# EAGLE board combined (EAGLE 5.11)
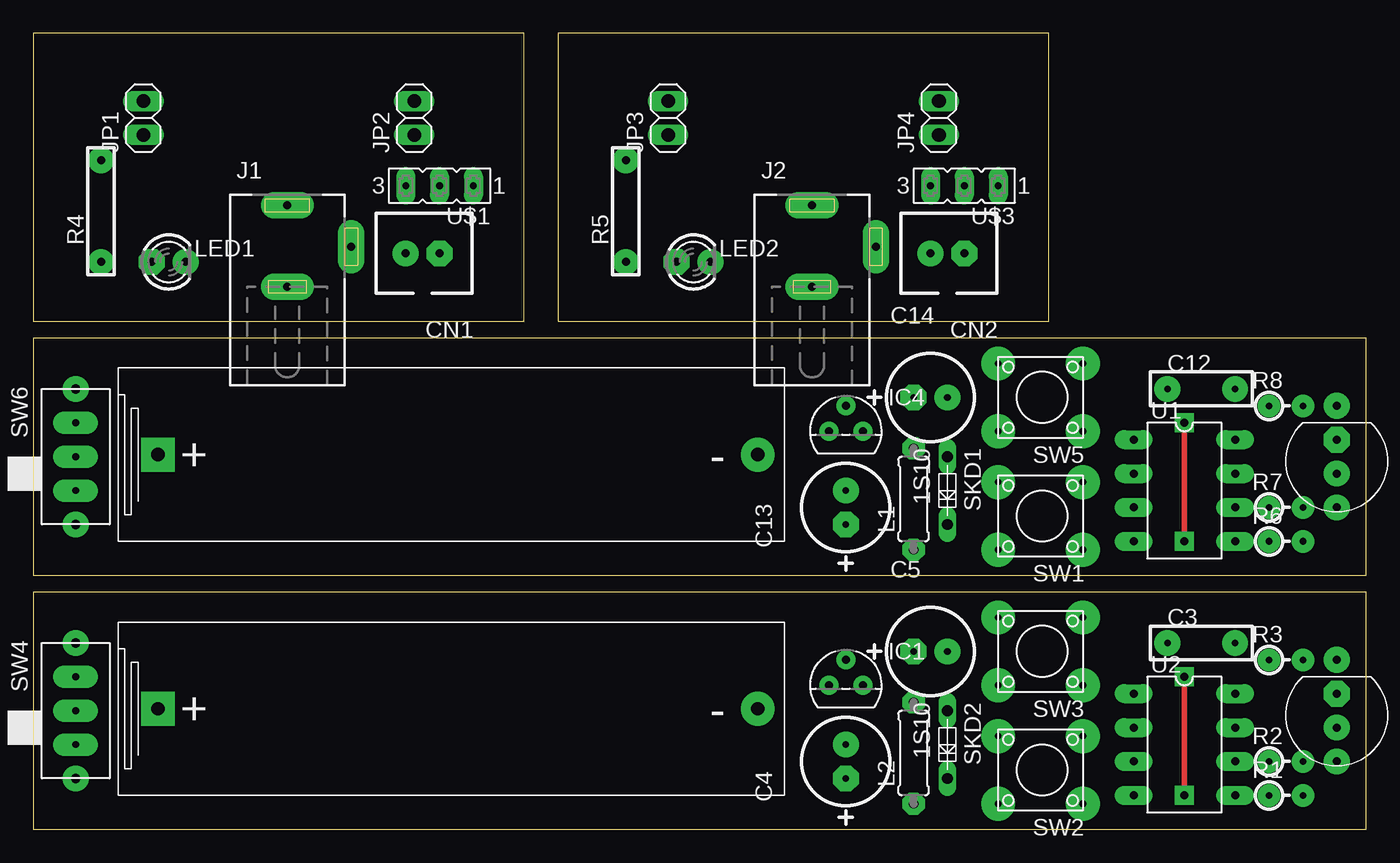
[diagram p0: board, top side]
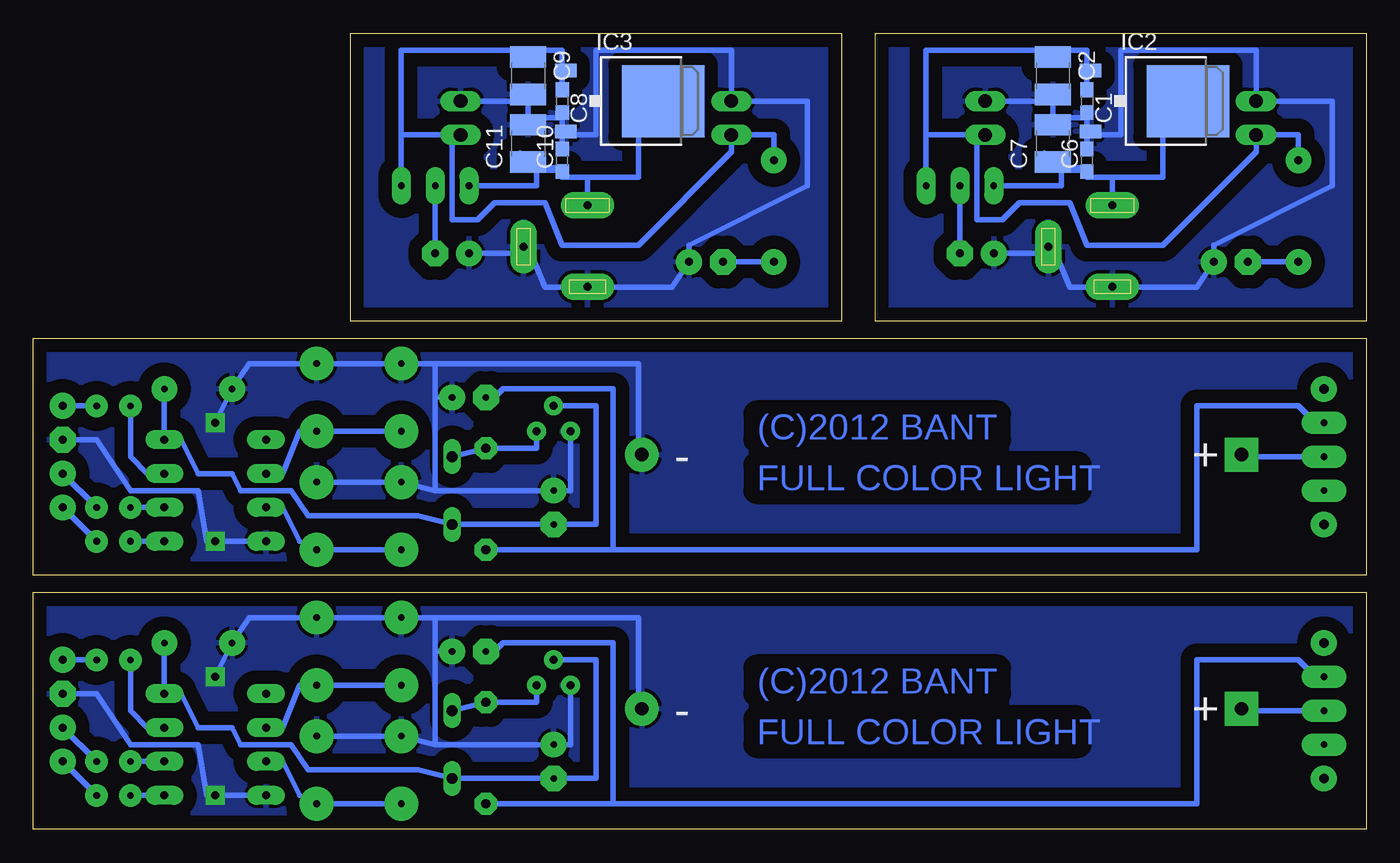
[diagram p1: board, bottom side, seen from below]

Size 100 x 59.69 mm. Coordinates in mm from the lower left corner, seen from the top.
Outline: 0,0 100,0 100,17.78 0,17.78 0,0
Outline: 36.83,38.1 36.83,59.69 0,59.69 0,38.1 36.83,38.1
Outline: 76.2,38.1 76.2,59.69 39.37,59.69 39.37,38.1 76.2,38.1
Outline: 0,19.05 100,19.05 100,36.83 0,36.83 0,19.05
Copper layers (1*16): Top 0.035mm / dielectric 1.5mm / Bottom 0.035mm
Design rules "default": minimum track width 10mil, minimum drill 24mil, track to track 8mil, track to pad 8mil, pad to pad 8mil, via to via 8mil, smd to smd 8mil, copper to edge 40mil, drill to drill 8mil, minimum pad ring 10mil, minimum via ring 8mil, stop-mask expansion 4mil, vias tented up to drill 0mil, thermal gap 10mil

## Footprints (pad centres in the part's own frame; a part is rotated, then mirrored left to right if it is on the bottom)
BH411-1P = drill 1 pad 2.54 round: BATT-MINUS 48,6.5 | drill 1 pad 2.54 square: BATT-PLUS 3,6.5
C1608 = smd 1.1 x 1: 1 -0.85,0; 2 0.85,0
C3225 = smd 1.6 x 2.7: 1 -1.4,0; 2 1.4,0
CAP_DIP_2 = drill 0.5 pad 1.93 round: 1 -2.54,0; 2 2.54,0
CCAP_6.5 = drill 0.5 pad 1.93 octagon: + -1.27,0 | drill 0.5 pad 1.93 round: - 1.27,0
CON_HRS_DIP_2 = drill 0.6 pad 1.93 octagon: 1 -1.27,0 | drill 0.6 pad 1.93 round: 2 1.27,0
TO92_TRI = drill 0.6 pad 1.422 round: 1 -1.27,0; 2 0,1.905; 3 1.27,0
TO252 = smd 1 x 1.6: 1 -2.28,-4.8; 2 2.28,-4.8 | smd 5.4 x 6.2: 3 0,2.5
DCJ0202 = drill 0.6 pad 2 long: 1 0,6.148; 2 4.8,3.048; 3 0,0.048
1X02 = drill 1.016 long: 1 -1.27,0; 2 1.27,0
0207/7 = drill 0.7 pad 1.676 octagon: 1 -3.81,0; 2 3.81,0
LED3MM = drill 0.6 pad 1.93 octagon: A -1.27,0 | drill 0.6 pad 1.93 round: K 1.27,0
R_0.125W_1 = drill 0.5 pad 1.676 round: 1 -1.27,0; 2 1.27,0
R_0.125W_3 = drill 0.6 pad 1.93 round: 1 -3.81,0; 2 3.81,0
R-1 = drill 0.8 long: 1-A -2.54,0; 2-K 2.54,0
B3F-10X = drill 0.5 pad 2.54 round: 1 -1.27,2.54; 2 5.08,2.54; 3 -1.27,-2.54; 4 5.08,-2.54
DS-3-SIDE = drill 0.5 pad 1.676 long: 1 0,-2.54; 2 0,0; 3 0,2.54 | drill 0.7 pad 1.93 round: P$1 0,5.08; P$2 0,-5.08
DIL08 = drill 0.6 pad 1.422 long: 1 -3.81,-3.81; 2 -1.27,-3.81; 3 1.27,-3.81; 4 3.81,-3.81; 5 3.81,3.81; 6 1.27,3.81; 7 -1.27,3.81; 8 -3.81,3.81
CON-S3-1 = drill 0.5 pad 1.422 long: 1 -2.54,0; 2 0,0; 3 2.54,0
OSTA-LED = drill 0.6 pad 1.93 round: P$1 -3.81,0; P$2 -1.27,0; P$4 3.81,0 | drill 0.6 pad 1.93 octagon: P$3 1.27,0

## Placement (x,y rotation side)
BATT1  BH411-1P  [BH411-1P]  6.35,2.54 0 top
BATT2  BH411-1P  [BH411-1P]  6.35,21.59 0 top
C1  0.1uF  [C1608]  20.95,54.61 270 bottom
C2  4.7uF  [C3225]  23.5,56.52 270 bottom
C3  0.1u(104)  [CAP_DIP_2]  87.63,13.97 0 top
C4  22u  [CCAP_6.5]  60.96,5.08 90 top
C5  47u  [CCAP_6.5]  67.31,13.34 0 top
C6  0.1uF  [C1608]  20.95,50.16 90 bottom
C7  10uF  [C3225]  23.5,51.44 90 bottom
C8  0.1uF  [C1608]  60.33,54.61 270 bottom
C9  4.7uF  [C3225]  62.87,56.52 270 bottom
C10  0.1uF  [C1608]  60.33,50.16 90 bottom
C11  10uF  [C3225]  62.87,51.44 90 bottom
C12  0.1u(104)  [CAP_DIP_2]  87.63,33.02 0 top
C13  22u  [CCAP_6.5]  60.96,24.13 90 top
C14  47u  [CCAP_6.5]  67.31,32.38 0 top
CN1  [CON_HRS_DIP_2]  29.21,43.18 180 top
CN2  [CON_HRS_DIP_2]  68.58,43.18 180 top
IC1  HT7750A  [TO92_TRI]  60.96,10.79 0 top
IC2  NJU7223DL1-33  [TO252]  15.88,54.61 270 bottom
IC3  NJU7223DL1-33  [TO252]  55.24,54.61 270 bottom
IC4  HT7750A  [TO92_TRI]  60.96,29.84 0 top
J1  DC_JACK  [DCJ0202]  19.05,40.64 0 top
J2  DC_JACK  [DCJ0202]  58.42,40.64 0 top
JP1  [1X02]  8.26,53.34 90 top
JP2  [1X02]  28.57,53.34 90 top
JP3  [1X02]  47.62,53.34 90 top
JP4  [1X02]  67.94,53.34 90 top
L1  100u  [0207/7]  66.04,24.77 90 top
L2  100u  [0207/7]  66.04,5.71 90 top
LED1  GREEN  [LED3MM]  10.16,42.55 0 top
LED2  GREEN  [LED3MM]  49.53,42.55 0 top
R1  100  [R_0.125W_1]  93.98,2.54 0 top
R2  100  [R_0.125W_1]  93.98,5.08 0 top
R3  200  [R_0.125W_1]  93.98,12.7 0 top
R4  330  [R_0.125W_3]  5.08,46.35 90 top
R5  330  [R_0.125W_3]  44.45,46.35 90 top
R6  100  [R_0.125W_1]  93.98,21.59 0 top
R7  100  [R_0.125W_1]  93.98,24.13 0 top
R8  200  [R_0.125W_1]  93.98,31.75 0 top
SKD1  1S10  [R-1]  68.58,25.4 270 top
SKD2  1S10  [R-1]  68.58,6.35 270 top
SW1  TACT-SW  [B3F-10X]  77.47,23.5 180 top
SW2  TACT-SW  [B3F-10X]  77.47,4.45 180 top
SW3  TACT-SW  [B3F-10X]  77.47,13.34 180 top
SW4  POWER SW  [DS-3-SIDE]  3.17,8.89 0 top
SW5  TACT-SW  [B3F-10X]  77.47,32.38 180 top
SW6  POWER SW  [DS-3-SIDE]  3.17,27.94 0 top
U1  ATTINY13  [DIL08]  86.36,25.4 270 top
U2  ATTINY13  [DIL08]  86.36,6.35 270 top
U$1  CON-S3-1  [CON-S3-1]  30.48,48.26 180 top
U$2  FULL-COLOR-LED  [OSTA-LED]  97.79,8.89 90 top
U$3  CON-S3-1  [CON-S3-1]  69.85,48.26 180 top
U$4  FULL-COLOR-LED  [OSTA-LED]  97.79,27.94 90 top

## Library data of the parts
BATT1 BATT2 = densikit
C1-C14 CN1 CN2 J1 J2 R1-R8 SW1-SW6 = MyLib
IC1 IC4 SKD1 SKD2 = keinSoft-01
IC2 IC3 U$1 U$3 = bant
JP1-JP4 = pinheader
L1 L2 = rcl
LED1 LED2 U$2 U$4 = led
U1 U2 = atmel

## Nets
GND: BATT1.BATT-MINUS C3.1 C4.- C5.- IC1.1 SW2.3 SW2.4 SW3.3 SW3.4 U2.4 U$2.P$3
GND1: C1.2 C2.2 C6.2 C7.2 CN1.2 IC2.2 J1.2 J1.3 JP1.2 JP2.2 LED1.K
GND2: C8.2 C9.2 C10.2 C11.2 CN2.2 IC3.2 J2.2 J2.3 JP3.2 JP4.2 LED2.K
GND3: BATT2.BATT-MINUS C12.1 C13.- C14.- IC4.1 SW1.3 SW1.4 SW5.3 SW5.4 U1.4 U$4.P$3
N$1: BATT1.BATT-PLUS SW4.2
N$2: R1.2 U$2.P$1
N$3: R2.2 U$2.P$2
N$4: R3.2 U$2.P$4
N$5: SW3.1 SW3.2 U2.2
N$6: R2.1 U2.6
N$7: R3.1 U2.7
N$8: CN1.1 U$1.2
N$9: R1.1 U2.5
N$10: LED1.A R4.1
N$11: IC1.3 L2.2 SKD2.1-A
N$12: LED2.A R5.1
N$13: CN2.1 U$3.2
N$14: SW2.1 SW2.2 U2.3
N$15: R6.2 U$4.P$1
N$16: R7.2 U$4.P$2
N$17: R8.2 U$4.P$4
N$18: SW1.1 SW1.2 U1.3
N$19: SW5.1 SW5.2 U1.2
N$20: R8.1 U1.7
N$21: R6.1 U1.5
N$22: IC4.3 L1.2 SKD1.1-A
N$23: BATT2.BATT-PLUS SW6.2
N$24: R7.1 U1.6
VCC: C3.2 C4.+ IC1.2 SKD2.2-K U2.8
VCC1: C1.1 C2.1 IC2.1 JP1.1 JP2.1 R4.2 U$1.1
VCC2: C8.1 C9.1 IC3.1 JP3.1 JP4.1 R5.2 U$3.1
VCC3: C12.2 C13.+ IC4.2 SKD1.2-K U1.8
VDD: C6.1 C7.1 IC2.3 J1.1 U$1.3
VDD1: C10.1 C11.1 IC3.3 J2.1 U$3.3
VPP: C5.+ L2.1 SW4.3
VPP1: C14.+ L1.1 SW6.3

## Tracks (layer width: path | path; a pad name or v marks a point on that pad's centre or on a via)
GND  (via drill 0.6 pad 1.42)
  Top 0.406: v86.36,11.43 v86.36,2.54
  Bottom 0.406: IC1.1 59.69,6.35 C4.- 69.85,6.35 | SW2.3 SW2.4 69.85,6.35 | U2.4 v86.36,2.54 87,2.54 87.63,6.35 92.71,6.35 95.25,10.16 U$2.P$3 | BATT1.BATT-MINUS 54.61,9.53 54.61,15.88 69.85,15.88 | 69.85,15.88 SW3.4 SW3.3 83.82,15.88 C3.1 v86.36,11.43 | 69.85,15.88 69.85,13.34 | 69.85,13.34 C5.- | 69.85,13.34 69.85,6.35
  pour Bottom (isolate 1.016): 0,17.78 0,0 100.33,0 100.33,17.78
GND1
  Bottom 0.254: 20.32,52.07 IC2.2 | LED1.K 11.43,43.18
  Bottom 0.406: 20.95,52.33 20.95,53.34 | IC2.2 20.95,52.33 | 20.95,52.33 C6.2 | 20.95,53.34 23.5,53.34 C7.2 C2.2 24.13,54.61 JP2.2 | 20.95,53.34 C1.2 | 20.32,52.07 18.41,52.07 18.41,58.42 8.26,58.42 JP1.2 2.54,54.61 2.54,48.26 11.43,43.81 11.43,43.18 | LED1.K 12.7,40.64 22.23,40.64 23.5,43.69 J1.2 23.85,43.18 CN1.2
  pour Bottom (isolate 1.016): 0,38.1 36.83,38.1 36.83,59.69 0,59.69
GND2
  Bottom 0.254: 59.69,52.07 IC3.2 | LED2.K 50.8,43.18
  Bottom 0.406: 60.33,52.33 60.33,53.34 | IC3.2 60.33,52.33 | 60.33,52.33 C10.2 | 60.33,53.34 62.87,53.34 C11.2 C9.2 63.5,54.61 JP4.2 | 60.33,53.34 C8.2 | 59.69,52.07 57.78,52.07 57.78,58.42 47.62,58.42 JP3.2 41.91,54.61 41.91,48.26 50.8,43.81 50.8,43.18 | LED2.K 52.07,40.64 61.59,40.64 62.87,43.69 J2.2 63.22,43.18 CN2.2
  pour Bottom (isolate 1.016): 39.37,38.1 76.2,38.1 76.2,59.69 39.37,59.69
GND3  (via drill 0.6 pad 1.42)
  Top 0.406: v86.36,30.48 v86.36,21.59
  Bottom 0.406: IC4.1 59.69,25.4 C13.- 69.85,25.4 | SW1.3 SW1.4 69.85,25.4 | U1.4 v86.36,21.59 87,21.59 87.63,25.4 92.71,25.4 95.25,29.21 U$4.P$3 | BATT2.BATT-MINUS 54.61,28.57 54.61,34.92 69.85,34.92 | 69.85,34.92 SW5.4 SW5.3 83.82,34.92 C12.1 v86.36,30.48 | 69.85,34.92 69.85,32.38 | 69.85,32.38 C14.- | 69.85,32.38 69.85,25.4
  pour Bottom (isolate 1.016): 0,36.83 0,19.05 100.33,19.05 100.33,36.83
N$1
  Bottom 0.406: SW4.2 8.89,8.89 BATT1.BATT-PLUS
N$2
  Bottom 0.406: R1.2 U$2.P$1
N$3
  Bottom 0.406: R2.2 U$2.P$2
N$4
  Bottom 0.406: R3.2 U$2.P$4
N$5
  Bottom 0.406: U2.2 81.28,7.62 80.01,10.79 SW3.1 SW3.2
N$6
  Bottom 0.406: U2.6 R2.1
N$7
  Bottom 0.406: U2.7 91.44,7.62 92.71,8.89 R3.1
N$8
  Bottom 0.406: CN1.1 U$1.2
N$9
  Bottom 0.406: U2.5 R1.1
N$10
  Bottom 0.406: LED1.A R4.1
N$11
  Bottom 0.406: SKD2.1-A L2.2 62.23,9.53 IC1.3
N$12
  Bottom 0.406: LED2.A R5.1
N$13
  Bottom 0.406: CN2.1 U$3.2
N$14
  Bottom 0.406: U2.3 81.28,5.08 80.01,2.54 SW2.1 SW2.2
N$15
  Bottom 0.406: R6.2 U$4.P$1
N$16
  Bottom 0.406: R7.2 U$4.P$2
N$17
  Bottom 0.406: R8.2 U$4.P$4
N$18
  Bottom 0.406: U1.3 81.28,24.13 80.01,21.59 SW1.1 SW1.2
N$19
  Bottom 0.406: U1.2 81.28,26.67 80.01,29.84 SW5.1 SW5.2
N$20
  Bottom 0.406: U1.7 91.44,26.67 92.71,27.94 R8.1
N$21
  Bottom 0.406: U1.5 R6.1
N$22
  Bottom 0.406: SKD1.1-A L1.2 62.23,28.57 IC4.3
N$23
  Bottom 0.406: SW6.2 8.89,27.94 BATT2.BATT-PLUS
N$24
  Bottom 0.406: U1.6 R7.1
VCC
  Bottom 0.406: C3.2 U2.8 88.9,10.16 87.63,7.62 85.09,7.62 84.45,6.35 80.64,6.35 79.38,4.45 71.12,4.45 SKD2.2-K C4.+ 57.78,3.81 57.78,12.7 IC1.2
VCC1
  Bottom 0.254: IC2.1 20.32,57.15
  Bottom 0.406: 20.95,56.89 C1.1 | R4.2 5.08,52.07 JP1.1 8.26,50.8 15.24,43.81 20.95,43.81 22.23,46.99 26.04,46.99 27.3,45.72 29.21,45.72 29.21,52.07 | 23.5,58.42 20.95,58.42 20.95,56.89 | 20.95,56.89 IC2.1 | 23.5,58.42 C2.1 | 23.5,58.42 33.02,58.42 33.02,52.07 | U$1.1 33.02,52.07 | 33.02,52.07 29.21,52.07 | 29.21,52.07 JP2.1
VCC2
  Bottom 0.254: IC3.1 59.69,57.15
  Bottom 0.406: 60.33,56.89 C8.1 | R5.2 44.45,52.07 JP3.1 47.62,50.8 54.61,43.81 60.33,43.81 61.59,46.99 65.41,46.99 66.67,45.72 68.58,45.72 68.58,52.07 | 62.87,58.42 60.33,58.42 60.33,56.89 | 60.33,56.89 IC3.1 | 62.87,58.42 C9.1 | 62.87,58.42 72.39,58.42 72.39,52.07 | U$3.1 72.39,52.07 | 72.39,52.07 68.58,52.07 | 68.58,52.07 JP4.1
VCC3
  Bottom 0.406: C12.2 U1.8 88.9,29.21 87.63,26.67 85.09,26.67 84.45,25.4 80.64,25.4 79.38,23.5 71.12,23.5 SKD1.2-K C13.+ 57.78,22.86 57.78,31.75 IC4.2
VDD
  Bottom 0.254: C7.1 24.13,50.8
  Bottom 0.406: 13.34,54.61 IC2.3 15.24,54.61 15.24,48.9 19.05,48.9 | 20.95,49.53 C6.1 20.95,48.9 19.05,48.9 | C7.1 22.86,50.03 22.86,49.53 22.86,48.26 U$1.3 | 19.05,48.9 J1.1
  Bottom 0.61: 22.86,49.53 20.95,49.53
VDD1
  Bottom 0.254: C11.1 63.5,50.8
  Bottom 0.406: 52.7,54.61 IC3.3 54.61,54.61 54.61,48.9 58.42,48.9 | 60.33,49.53 C10.1 60.33,48.9 58.42,48.9 | C11.1 62.23,50.03 62.23,49.53 62.23,48.26 U$3.3 | 58.42,48.9 J2.1
  Bottom 0.61: 62.23,49.53 60.33,49.53
VPP
  Bottom 0.406: C5.+ 65.41,13.34 64.77,13.97 56.52,13.97 56.52,1.91 | SW4.3 3.81,11.43 5.08,12.7 12.7,12.7 12.7,1.91 56.52,1.91 | 56.52,1.91 L2.1
VPP1
  Bottom 0.406: C14.+ 65.41,32.38 64.77,33.02 56.52,33.02 56.52,20.95 | SW6.3 3.81,30.48 5.08,31.75 12.7,31.75 12.7,20.95 56.52,20.95 | 56.52,20.95 L1.1

## Text on the board
Bottom: (C)2012 BANT | FULL COLOR LIGHT | (C)2012 BANT | FULL COLOR LIGHT